# Altium PCB cw312_xc7a35t.PcbDoc (part 2 of 2)
Units mil, origin at the board's own origin, x right, y up, seen from the top; angles counter-clockwise.
Board outline 2310.04 x 2113.83 mil, 4 copper layers (Top Layer, Layer 1, Layer 2, Bottom Layer), stack 23.756 mil thick; 64 components, 69 nets, 577 pads, 221 vias.
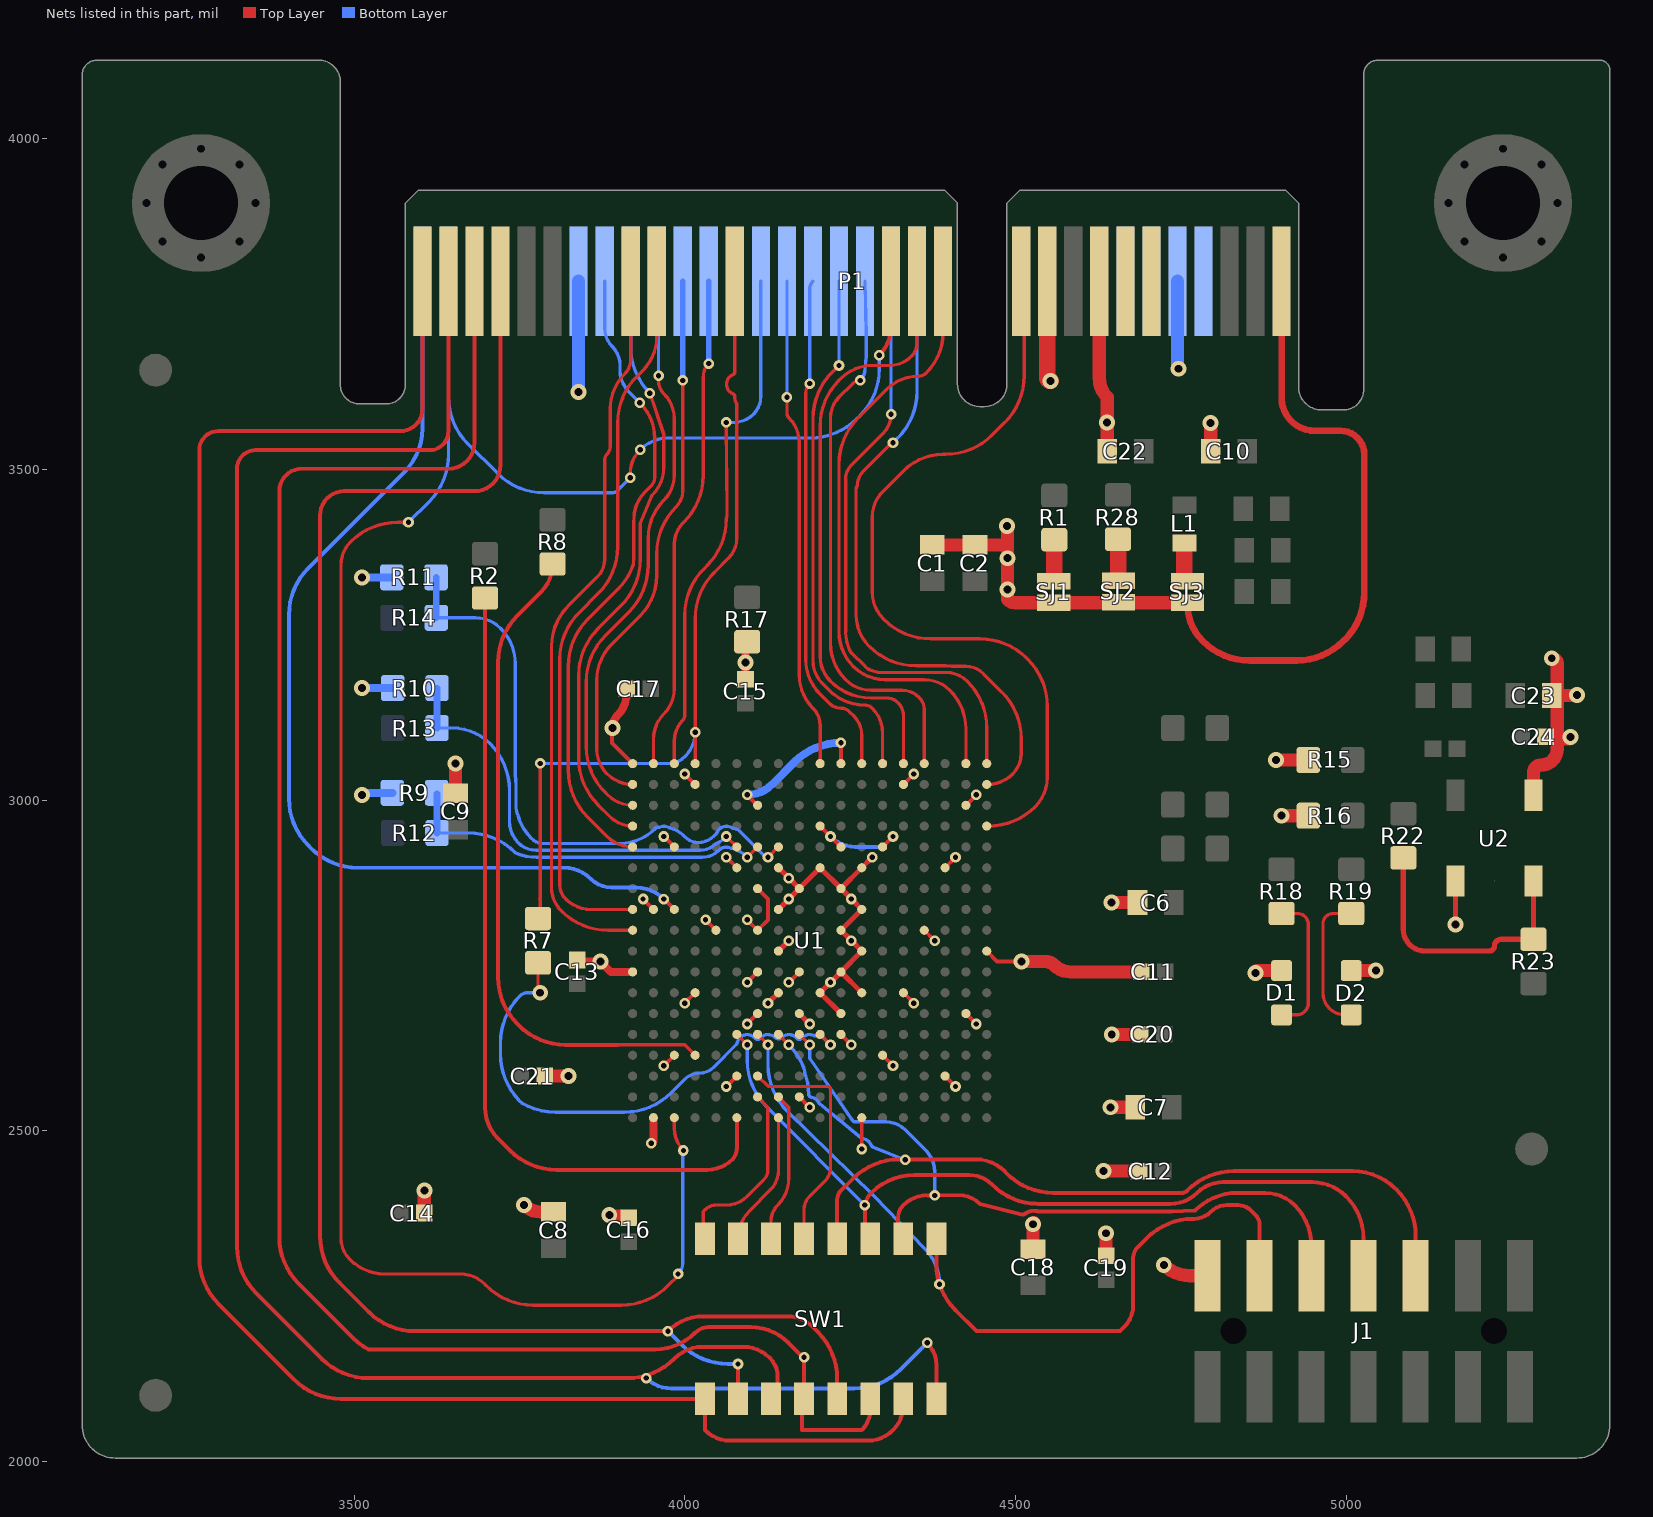
[diagram p4: the nets of this part, all layers, seen from the top]

## Via types
v1: diameter 16, hole 8, Top Layer to Bottom Layer, tented both sides, 129 vias
v2: diameter 24, hole 12, Top Layer to Bottom Layer, tented both sides, 92 vias

## Nets (pads, with @x,y where several pads share a name; then routed paths per layer and width w, separated by ;. In a path a pad name is that pad's centre, name@x,y a point inside that pad or via, vN(x,y) a via of type N, cw(c..) or ccw(c..) an arc to the next point about the centre after c; other vN are vias at no path point) (continued)
HDR5: P1.A13 U1.U1 | length 992.2
  Top Layer w5: v1(4314.96,3540.37) ccw(c4314.96,3536.53) 4312.25,3539.25 4270.19,3497.19 ccw(c4292.38,3475) 4261,3475 ccw(c4265.52,3470.48) 4259.13,3470.48 4259.13,3280.57 ccw(c4327.41,3280.57) 4279.13,3232.29 ccw(c4349.84,3303) 4349.84,3203 4395.04,3203 cw(c4395.04,3147.24) 4403.62,3202.34 ccw(c4404.35,3207.28) 4404.32,3202.28 4425,3202.28 cw(c4425,3164.47) 4451.74,3191.21 4479.57,3163.38 cw(c4408.86,3092.67) 4508.86,3092.67 4508.86,3070.41 cw(c4464.96,3070.41) 4496,3039.37 cw(c4457.98,3077.39) 4457.98,3023.62 U1.U1@4456.69,3023.62
  Bottom Layer w5: v1(4314.96,3540.37) 4322.09,3547.5 ccw(c4251.38,3618.21) 4351.38,3618.21 P1.A13@4351.38,3784.54
HDR6: P1.A14 U1.V1 | length 911.1
  Top Layer w5: v1(4312.01,3583.5) cw(c4270.75,3583.5) 4299.92,3554.33 4251.97,3506.37 ccw(c4272.97,3485.37) 4243.27,3485.37 4243.27,3254.47 ccw(c4307.47,3254.47) 4251,3223.91 ccw(c4255.38,3226.32) 4251.82,3222.82 4272.64,3202 ccw(c4294.37,3223.73) 4277.44,3198.08 ccw(c4280.15,3202.28) 4277.9,3197.82 ccw(c4303.28,3250.28) 4291.8,3193.14 ccw(c4292.76,3198.05) 4292.38,3193.06 ccw(c4294.37,3223.73) 4294.37,3193 4395.04,3193 cw(c4395.04,3147.24) 4427.4,3179.6 cw(c4356.69,3108.89) 4456.69,3108.89 U1.V1@4456.69,3055.12
  Bottom Layer w5: v1(4312.01,3583.5) P1.A14@4312.01,3784.54
HDR7: P1.A15 U1.V4 | length 851.3
  Top Layer w5: 4254.07,3629.8 4233.27,3609 ccw(c4264.16,3578.11) 4220.47,3578.11 4220.47,3237.03 ccw(c4298.3,3237.03) 4243.27,3182 ccw(c4281.9,3220.63) 4281.9,3166 4329.21,3166 cw(c4329.21,3131.37) 4353.7,3155.86 4355.09,3154.47 cw(c4337.92,3137.29) 4362.2,3137.29 U1.V4@4362.2,3055.12 ; 4254.08,3629.81 cw(c4265.52,3618.35) v1(4265.52,3634.54)
  Bottom Layer w5: v1(4265.52,3634.54) ccw(c4248.33,3651.73) 4272.64,3651.73 cw(c4277.64,3651.73) 4272.66,3652.23 4274.55,3671.23 ccw(c4259.13,3672.77) 4274.63,3672.78 4274.63,3704.37 P1.A15@4272.64,3784.54
HDR8: P1.A16 U1.V6 | length 799
  Top Layer w5: v1(4233.27,3657.16) 4223.19,3647.08 ccw(c4293.9,3576.37) 4193.9,3576.37 4193.9,3211.06 ccw(c4243.73,3211.06) 4208.49,3175.83 4218.4,3165.92 ccw(c4272.04,3219.55) 4272.04,3143.7 cw(c4272.04,3127.54) 4283.46,3138.97 cw(c4245.45,3100.95) 4299.21,3100.95 U1.V6@4299.21,3055.12
  Bottom Layer w5: v1(4233.27,3657.16) P1.A16@4233.27,3784.54
HDR9: P1.A17 U1.V7 | length 771.1
  Top Layer w5: v1(4188.98,3629.81) ccw(c4203.4,3615.38) 4183,3615.38 4183,3212.74 ccw(c4257.69,3212.74) 4204.88,3159.93 4218.49,3146.31 ccw(c4236.22,3164.04) 4236.22,3138.97 cw(c4236.22,3120.7) 4249.14,3133.62 4255.38,3127.37 cw(c4225.61,3097.6) 4267.72,3097.6 U1.V7@4267.72,3055.12
  Bottom Layer w5: v1(4188.98,3629.81) 4188.98,3772.66 cw(c4205.78,3772.66) P1.A17@4193.9,3784.54
HDR10: P1.A18 U1.V9 | length 742.8
  Top Layer w5: v1(4154.53,3609) 4154.53,3585.39 ccw(c4164.61,3585.39) 4157.48,3578.26 cw(c4120.01,3540.79) 4173,3540.79 4173,3212.74 ccw(c4257.69,3212.74) 4173.22,3206.67 cw(c4168.23,3206.35) 4173.23,3206.38 4173.23,3188.87 ccw(c4243.8,3188.87) 4193.9,3138.97 cw(c4167.76,3112.83) 4204.72,3112.83 U1.V9@4204.72,3055.12
  Bottom Layer w5: v1(4154.53,3609) P1.A18@4154.53,3784.54
IOVREF: C6.1 C7.1 C8.1 C9.1 C10.1 C11.1 C12.1 C13.1 C14.1 C15.1 C16.1 C17.1 C23.1 C24.1 D1.A D2.A J1.2 P1.A5 P1.A26 P1.B10 R9.2 R10.2 R11.2 R15.1 R16.1 R17.1 U1.A7 U1.A17 U1.B10 U1.C3 U1.C13 U1.D6 U1.D16 U1.F2 U1.G5 U1.G15 U1.H18 U1.J1 U1.K4 U1.K14 U1.L17 U1.N3 U1.N13 U1.P6 U1.P8 U1.P16 U1.R9 U1.T2 U1.T12 U1.U5 U1.U15 U1.V8 U1.V18 U2.1 U2.4 | length 2884.9
  Top Layer w6: v2(3890.76,3108.89) ccw(c3890.76,3107.89) 3889.76,3107.89 3889.76,3086.61 U1.V18@3921.26,3055.12 ; v1(3937,2850.36) U1.L17@3952.76,2834.65 ; v1(3968.5,2598.43) U1.D16@3984.25,2614.17 ; v1(3968.5,2944.88) U1.P16@3984.25,2929.13 ; v1(4000,2692.56) 4000,2692.91 U1.G15@4015.75,2708.66 ; v1(4000,3039.37) U1.U15@4015.75,3023.62 ; v1(4031.5,2818.9) U1.K14@4047.24,2803.15 ; v1(4062.99,2566.93) U1.C13@4078.74,2582.68 ; v1(4062.99,2913.39) U1.N13@4078.74,2897.64 ; v1(4094.49,3007.87) U1.T12@4110.24,2992.13 ; U1.B10@4173.23,2551.18 v1(4188.98,2535.43) ; U1.R9@4204.72,2960.63 v1(4220.47,2944.88) U1.P8@4236.22,2929.13 ; U1.V8@4236.22,3055.12 v1(4236.22,3086.61) ; v1(4267.72,2472.44) U1.A7@4267.72,2519.69 ; U1.D6@4299.21,2614.17 v1(4314.96,2598.43) ; U1.P6@4299.21,2929.13 v1(4314.96,2944.88) ; U1.G5@4330.71,2708.66 4346.46,2692.91 v1(4346.46,2692.56) ; U1.U5@4330.71,3023.62 v1(4346.46,3039.37) ; U1.K4@4362.2,2803.15 v1(4377.95,2787.4) ; U1.C3@4393.7,2582.68 v1(4409.45,2566.93) ; U1.N3@4393.7,2897.64 v1(4409.45,2913.39) ; U1.F2@4425.2,2677.17 v1(4440.94,2661.42) ; U1.T2@4425.2,2992.13 v1(4440.94,3007.87) ; U1.J1@4456.69,2771.65 4472.44,2755.91 v2(4509.13,2755.91)
  Top Layer w8: v2(5165.35,2811.93) U2.1@5165.35,2877.53
  Top Layer w12: C13.1@3837.71,2758.27 ccw(c3843.41,2763.97) 3843.41,2755.91 v2(3872.49,2755.91) 3888.24,2740.16 U1.H18@3921.26,2740.16 ; v2(3890.76,3108.89) 3890.76,3109.56 cw(c3917.7,3109.56) 3898.65,3128.61 ccw(c3865.52,3161.74) 3912.37,3161.74 C17.1@3912.37,3168.11 ; v1(3949.42,2481.2) 3952.76,2484.53 U1.A17@3952.76,2519.69 ; C15.1@4092,3182.58 v2(4092,3208.23) 4092,3237.04 cw(c4094.49,3237.04) R17.1@4094.49,3239.53
  Top Layer w20: C14.1@3606.3,2375.56 v2(3606.3,2409.45) ; C9.1@3653.54,3010.46 v2(3653.54,3055.36) ; v2(3757.08,2387.58) ccw(c3781.87,2412.37) 3781.87,2377.31 ; v2(3885.96,2372.65) 3887.05,2372.65 3888.79,2370.91 3912.91,2370.91 C16.1@3915.5,2368.31 ; v2(4509.13,2755.91) 4545.81,2755.91 cw(c4545.81,2738.67) 4558,2750.86 ccw(c4583.83,2776.68) 4583.83,2740.16 C11.1@4690.55,2740.16 ; v2(4632.98,2438.93) C12.1@4686.92,2438.93 ; v2(4643.63,2535.43) C7.1@4681.1,2535.43 ; v2(4645.3,2845.11) C6.1@4684.67,2845.11 ; v2(4724.41,2297.15) ccw(c4763.73,2336.47) 4763.73,2280.86 J1.2@4790.35,2280.86 ; C10.1@4795.28,3527.56 v2(4795.28,3570.41) ; v2(4863,2738.67) cw(c4866.46,2738.67) 4866.46,2742.13 D1.A@4902.56,2742.13 ; v2(4894.31,3060.63) R15.1@4942.91,3060.63 ; v2(4902.56,2976.38) R16.1@4942.91,2976.38 ; D2.A@5007.87,2742.13 v2(5045,2742.13) ; U2.4@5283.46,3007.45 5283.46,3041.16 cw(c5295.33,3041.16) 5295.33,3053.03 ccw(c5295.33,3077.11) 5319.41,3077.11 5319.41,3092.67 ; C23.1@5311.02,3158.05 C23.1@5319.41,3158.05 ; v2(5311.02,3214.41) cw(c5311.02,3206.02) 5319.41,3206.02 C23.1@5319.41,3158.05 ; v2(5339.26,3095.19) cw(c5336.74,3095.19) 5336.74,3092.67 5319.41,3092.67 ; v2(5349,3159) cw(c5348.05,3159) 5348.05,3158.05 C23.1@5319.41,3158.05 ; 5319.41,3092.67 C23.1@5319.41,3158.05
  Top Layer w25: P1.B10@4548.23,3784.54 4548.23,3638.7 ccw(c4553.13,3638.7) v2(4553.13,3633.8)
  Bottom Layer w6: v1(4220.47,2944.88) ccw(c4258.49,2982.9) 4258.49,2929.13 4280.18,2929.13 ccw(c4280.14,2935.13) 4281.02,2929.2 cw(c4283.46,2913.39) 4285.73,2929.22 ccw(c4286.53,2935.17) 4286.45,2929.17 4292.45,2929.13 ccw(c4292.45,2945.46) 4303.99,2933.92 v1(4314.96,2944.88)
  Bottom Layer w12: v2(3511.81,3007.87) cw(c3519.41,3000.27) 3519.41,3011.02 R9.2@3557.82,3011.02 ; v2(3511.81,3169.36) R10.2@3558.43,3169.37 ; v2(3511.81,3336.81) R11.2@3557.11,3336.81 ; v1(4094.49,3007.87) ccw(c4094.49,3060.63) 4131.79,3023.33 4165.99,3057.52 cw(c4236.22,2987.29) v1(4236.22,3086.61)
  Bottom Layer w20: v2(3839.57,3617) P1.A26@3839.57,3784.54 ; P1.A5@4745.08,3784.54 4745.08,3656.17 ccw(c4750.65,3656.17) v2(4746.71,3652.23)
JTAG_TCK: P1.B32 SW1.1 SW1.7 | length 3046.9
  Top Layer w6: P1.B32@3603.35,3784.54 3603.35,3591.27 cw(c3570.08,3591.27) 3570.08,3558 3295,3558 ccw(c3295,3529) 3266,3529 3266,2308.66 ccw(c3366,2308.66) 3295.29,2237.95 3409.46,2123.78 ccw(c3480.17,2194.49) 3480.17,2094.49 SW1.1@4030.52,2094.49 4030.52,2047.24 ccw(c4068.54,2085.26) 4068.54,2031.5 4276.94,2031.5 ccw(c4276.94,2085.26) 4314.96,2047.24 ccw(c4277.41,2084.8) 4330.52,2084.8 SW1.7@4330.52,2094.49
JTAG_TDI: P1.B29 SW1.2 SW1.5 | length 2809.3
  Top Layer w6: P1.B29@3721.46,3784.54 3721.46,3506.37 cw(c3682.09,3506.37) 3682.09,3467 3485.1,3467 ccw(c3485.1,3430.46) 3448.57,3430.46 3448.57,2340.89 ccw(c3548.57,2340.89) 3477.86,2270.18 3521.74,2226.29 ccw(c3592.45,2297) 3592.45,2197 v1(3974.57,2197) cw(c4028.39,2143.18) 4028.39,2219.29 4154.55,2219.29 cw(c4154.55,2163.65) 4193.9,2203 4201.23,2195.67 cw(c4130.52,2124.96) 4230.52,2124.96 SW1.5@4230.52,2094.49 ; SW1.2@4080.52,2094.49 v1(4080.52,2147.34)
  Bottom Layer w6: v1(3974.57,2197) 3994.95,2176.63 ccw(c4065.66,2247.34) 4065.66,2147.34 v1(4080.52,2147.34)
JTAG_TDO: P1.B30 SW1.4 SW1.6 | length 2867.4
  Top Layer w6: P1.B30@3682.09,3784.54 3682.09,3540.37 cw(c3642.72,3540.37) 3642.72,3501 3421,3501 ccw(c3421,3467) 3387,3467 3387,2339.46 ccw(c3487,2339.46) 3416.29,2268.75 3498.27,2186.77 ccw(c3568.98,2257.48) 3521.74,2169.34 3955.04,2169.34 ccw(c3955.04,2255.19) 4015.75,2194.49 cw(c4036.29,2173.95) 4036.29,2203 4099.81,2203 cw(c4099.81,2122.31) 4156.86,2179.36 4177.5,2158.73 ccw(c4180.52,2161.75) v1(4180.52,2157.48) SW1.4@4180.52,2094.49 ccw(c4187.81,2087.2) 4177.5,2087.2 4177.5,2047.24 4267.72,2047.24 ccw(c4236.82,2078.15) 4280.52,2078.15 SW1.6@4280.52,2094.49
JTAG_TMS: P1.B31 SW1.3 SW1.8 | length 3285.5
  Top Layer w6: P1.B31@3642.72,3784.54 3642.72,3557.86 cw(c3613.86,3557.86) 3613.86,3529 3351,3529 ccw(c3351,3501) 3323,3501 3323,2324.72 ccw(c3423,2324.72) 3352.29,2254.01 3451.03,2155.27 ccw(c3521.74,2225.98) 3521.74,2125.98 3913.54,2125.98 ccw(c3913.54,2225.98) 3984.25,2155.27 cw(c4027.6,2111.93) 4027.6,2173.23 4088.59,2173.23 cw(c4088.59,2117.65) 4127.89,2156.95 4129.56,2155.27 cw(c4102.94,2128.65) 4140.59,2128.65 4140.59,2118.81 cw(c4106.2,2118.81) SW1.3@4130.52,2094.49 ; v1(4366.68,2179.36) cw(c4333.26,2145.95) 4380.52,2145.95 SW1.8@4380.52,2094.49
  Bottom Layer w6: v1(3942.06,2125.98) ccw(c3980.08,2164) 3980.08,2110.24 4256.13,2110.24 ccw(c4256.13,2210.24) 4326.84,2139.53 v1(4366.68,2179.36)
JTAG_TRST: P1.A32 U1.L16 | length 1518.5
  Top Layer w6: v1@3968.5,2850.39 U1.L16@3984.25,2834.65
  Bottom Layer w6: P1.A32@3603.35,3784.54 3603.35,3561.95 cw(c3510.17,3561.95) 3576.06,3496.06 3430.86,3350.87 ccw(c3501.57,3280.16) 3401.57,3280.16 3401.57,3002.05 ccw(c3501.57,3002.05) 3430.86,2931.34 3435.28,2926.93 ccw(c3505.99,2997.64) 3505.99,2897.64 3817.39,2897.64 cw(c3817.39,2840.1) 3858.08,2880.79 ccw(c3889.83,2912.54) 3889.83,2867.63 3926.58,2867.63 cw(c3926.58,2808.35) v1(3968.5,2850.27)
LED1: P1.B11 U1.R1 | length 1195.7
  Top Layer w5: U1.R1@4456.69,2960.63 4459.21,2960.63 ccw(c4459.21,3060.63) 4529.92,2989.92 ccw(c4485.72,3034.12) 4548.23,3034.12 4548.23,3142.03 ccw(c4448.23,3142.03) 4518.94,3212.74 4517.27,3214.41 ccw(c4446.56,3143.7) 4446.56,3243.7 4372.01,3243.7 cw(c4372.01,3343.7) 4301.3,3272.99 4300.83,3273.46 cw(c4342.75,3315.38) 4283.46,3315.38 4283.46,3427.26 cw(c4339.66,3427.26) 4299.92,3467 4331.07,3498.14 cw(c4390.62,3438.59) 4390.62,3522.81 4394.42,3522.81 ccw(c4394.42,3622.81) 4465.13,3552.1 4484.02,3570.99 ccw(c4413.31,3641.7) 4513.31,3641.7 4513.31,3773.79 ccw(c4498.1,3773.79) P1.B11@4508.86,3784.54
LED2: P1.B12 U1.V2 | length 935.4
  Top Layer w5: P1.B12@4390.75,3784.54 4390.75,3707.59 cw(c4303.27,3707.59) 4365.13,3645.73 cw(c4353.7,3657.16) 4353.7,3641 ccw(c4353.7,3572.43) 4305.21,3620.92 4262.56,3578.26 ccw(c4333.27,3507.55) 4233.27,3507.55 4233.27,3254.47 ccw(c4307.47,3254.47) 4255,3202 ccw(c4303.28,3250.28) 4303.28,3182 4362.37,3182 cw(c4362.37,3127.37) 4401,3166 cw(c4342.58,3107.58) 4425.2,3107.58 U1.V2@4425.2,3055.12
LED3: P1.B13 U1.V5 | length 907.5
  Top Layer w5: U1.V5@4330.71,3055.12 4330.71,3127.51 ccw(c4302.81,3127.51) 4322.54,3147.24 4322.45,3147.33 ccw(c4305.21,3130.09) 4305.21,3154.47 4281.15,3154.47 cw(c4281.15,3240.27) 4220.47,3179.6 cw(c4258.49,3217.62) 4204.72,3217.62 4204.72,3565.63 cw(c4302.18,3565.63) 4233.27,3634.54 4236.38,3637.66 cw(c4283.46,3590.57) 4283.46,3657.16 4309.59,3657.16 ccw(c4309.59,3704.41) 4343,3671 ccw(c4322.77,3691.23) 4351.38,3691.23 P1.B13@4351.38,3784.54
M0: R9.1 R12.2 U1.P12 | length 570
  Top Layer w5: v1(4094.49,2913.39) U1.P12@4110.24,2929.13
  Bottom Layer w5: R9.1@3624.75,3011.02 cw(c3623.29,3009.56) R9.1@3625.35,3009.56 ; R12.2@3625.35,2950.27 3672.52,2950.27 cw(c3672.52,2850.27) 3743.23,2920.98 3743.88,2920.34 ccw(c3775.82,2990.27) 3775.82,2913.39 4026.81,2913.39 ccw(c4026.81,2946.22) 4050.03,2923 ccw(c4048.32,2927.7) 4051.88,2924.19 cw(c4062.99,2913.39) 4069.72,2927.35 ccw(c4071.85,2931.87) 4070.78,2926.99 cw(c4061.63,2883.77) 4092.86,2915.01 v1(4094.49,2913.39)
  Bottom Layer w10: R12.2@3625.35,2950.27 R9.1@3625.35,3009.56
M1: R10.1 R13.2 U1.P13 | length 654.6
  Top Layer w5: v1(4062.99,2944.88) U1.P13@4078.74,2929.13
  Bottom Layer w5: R13.2@3625.35,3108.89 3648.84,3108.89 cw(c3648.84,3028.5) 3705.68,3085.34 cw(c3634.97,3014.63) 3734.97,3014.63 3734.97,2968.01 ccw(c3781.47,2968.01) 3748.59,2935.13 ccw(c3775,2961.55) 3775,2924.19 4023.72,2924.19 ccw(c4023.72,2956.52) 4046.58,2933.66 ccw(c4045.84,2938.61) 4048.62,2934.45 cw(c4062.99,2913.39) 4052.73,2936.73 ccw(c4050.69,2941.29) 4053.38,2937.08 ccw(c4020.66,2987.21) v1(4062.99,2944.88)
  Bottom Layer w10: R13.2@3625.35,3108.89 R10.1@3625.35,3169.37
M2: R11.1 R14.2 U1.P11 | length 915.5
  Top Layer w5: v1(4125.98,2913.39) 4125.98,2913.7 4141.42,2929.13 U1.P11@4141.73,2929.13
  Bottom Layer w5: R14.2@3624.36,3275.59 3683.44,3275.59 cw(c3683.44,3221.82) 3721.46,3259.84 cw(c3667.33,3205.72) 3743.88,3205.72 3743.88,3038.33 ccw(c3748.88,3038.37) 3743.92,3037.71 cw(c3634.97,3022.55) 3744.97,3022.55 3744.97,2988.61 ccw(c3749.97,2988.64) 3745.03,2987.88 ccw(c3829.55,3001.87) 3768.97,2941.29 ccw(c3785.48,2957.81) 3785.48,2934.45 3902.02,2934.45 ccw(c3902.02,3008.65) 3954.48,2956.18 cw(c3961.39,2949.27) 3961.39,2959.05 ccw(c3961.22,2964.04) 3962.97,2959.36 cw(c3968.5,2944.88) 3976.4,2958.22 ccw(c3978.91,2962.54) 3977.77,2957.67 cw(c3968.5,2916.88) 3998.08,2946.46 4000.14,2944.41 ccw(c4020.66,2964.93) 4020.66,2935.9 ccw(c4020.66,2969.66) 4044.54,2945.79 4046.8,2948.05 ccw(c4043.78,2952.04) 4048.46,2950.27 cw(c4062.99,2944.88) 4071.28,2957.98 ccw(c4073.66,2962.38) 4073.19,2957.4 cw(c4071.85,2941.61) 4083.06,2952.81 4120.01,2915.86 ccw(c4125.98,2921.83) v1(4125.98,2913.39)
  Bottom Layer w10: R11.1@3624.04,3336.81 3624.04,3275.91 R14.2@3624.36,3275.59
MISO: P1.B23 U1.L18 | length 1086.9
  Top Layer w5: U1.L18@3921.26,2834.65 3857.9,2834.65 cw(c3857.9,2888.41) 3819.88,2850.39 cw(c3841.27,2871.78) 3811.02,2871.78 3811.02,3212.72 cw(c3911.02,3212.72) 3840.31,3283.43 3869.36,3312.48 ccw(c3798.65,3383.19) 3898.65,3383.19 3898.65,3570.41 cw(c3998.65,3570.41) 3927.94,3641.12 3937.01,3650.19 ccw(c3887.11,3700.08) 3957.68,3700.08 P1.B23@3957.68,3784.54
MOSI: P1.B24 U1.K18 | length 1110.3
  Top Layer w5: P1.B24@3918.31,3784.54 3918.31,3666.61 cw(c3885.65,3666.61) 3908.74,3643.52 ccw(c3960.5,3591.76) 3887.3,3591.76 3887.3,3534.64 cw(c3870.56,3534.64) 3882.4,3522.81 ccw(c3890.76,3514.45) 3878.94,3514.45 3878.94,3364.25 cw(c3840.85,3364.25) 3867.78,3337.32 3824,3293.54 ccw(c3885.2,3232.34) 3798.65,3232.34 3798.65,2867.63 ccw(c3848.43,2867.63) 3813.23,2832.44 ccw(c3883.94,2903.15) 3883.94,2803.15 U1.K18@3921.26,2803.15
NetD1_K: D1.K R18.2 | length 219.3
  Top Layer w5: D1.K@4902.56,2675.2 4925.2,2675.2 ccw(c4925.2,2692.91) 4942.91,2692.91 4942.91,2811.93 ccw(c4926.34,2811.93) 4926.34,2828.5 R18.2@4902.56,2828.5
NetD2_K: D2.K R19.2 | length 218
  Top Layer w5: D2.K@5007.87,2675.2 4998.49,2675.2 cw(c4998.49,2708.66) 4965.03,2708.66 4965.03,2812.97 cw(c4980.55,2812.97) 4980.55,2828.5 R19.2@5007.87,2828.5
NetJ1_4: J1.4 SW1.9 U1.E12 | length 1292.5
  Top Layer w5: U1.E12@4110.24,2645.67 v1(4125.98,2629.92)
  Top Layer w6: SW1.9@4380.52,2336.61 4380.52,2298.85 ccw(c4480.52,2298.85) 4409.81,2228.14 4440.94,2197 4658.39,2197 4664.39,2203 ccw(c4631.16,2236.22) 4678.15,2236.22 4678.15,2307.79 cw(c4700.41,2307.79) 4684.67,2323.53 4698.74,2337.6 cw(c4769.45,2266.89) 4769.45,2366.89 4770.11,2366.89 ccw(c4770.11,2402.48) 4795.28,2377.31 cw(c4820.06,2352.52) 4820.06,2387.58 4836.34,2387.58 cw(c4836.34,2359.26) 4856.36,2379.28 4863,2372.65 cw(c4848.29,2357.93) 4869.09,2357.93 J1.4@4869.09,2280.86
  Bottom Layer w5: v1(4125.98,2629.92) 4125.98,2599.95 ccw(c4225.98,2599.95) 4155.26,2529.25 4155.3,2529.21 4286.07,2401.53 cw(c4272.44,2387.58) 4286.5,2401.09 4363,2321.51 ccw(c4366.6,2324.98) 4363.05,2321.46 ; 4363.08,2321.43 cw(c4309.33,2267.72) v1(4385.32,2267.72)
NetJ1_6: J1.6 SW1.10 U1.E10 | length 1139.2
  Top Layer w5: U1.E10@4173.23,2645.67 v1(4188.98,2629.92)
  Top Layer w6: SW1.10@4330.52,2336.61 cw(c4349.78,2355.88) 4322.54,2355.88 4322.54,2368.31 cw(c4349.33,2368.31) 4330.39,2387.25 cw(c4367.13,2350.51) 4367.13,2402.48 4367.39,2402.21 v1(4377.95,2402.21) ; v1@4377.95,2402.48 4414.51,2402.48 cw(c4414.51,2357.15) 4446.56,2389.2 4509.75,2373.55 ccw(c4511.15,2379.39) 4514.73,2374.57 cw(c4526.76,2358.6) 4521.3,2377.84 ccw(c4519.61,2383.6) 4521.61,2377.94 cw(c4527.77,2361.03) 4532.48,2378.4 ccw(c4534.01,2384.2) 4533.97,2378.2 4734.17,2378.2 ccw(c4734.17,2446.64) 4736.2,2378.23 4771.65,2379.28 cw(c4836.21,2314.73) 4783.4,2389.2 cw(c4836.21,2314.73) 4836.21,2406.02 4877.71,2406.02 cw(c4877.71,2343.05) 4922.25,2387.58 cw(c4860.47,2325.8) 4947.83,2325.8 J1.6@4947.83,2280.86
  Bottom Layer w5: v1(4188.98,2629.92) 4188.98,2611.1 ccw(c4193.98,2611.1) 4189.85,2608.28 4253.67,2515.65 ccw(c4257.78,2518.5) 4257.78,2513.5 4303.99,2513.5 cw(c4303.99,2472.12) 4333.26,2501.38 4364.95,2469.69 cw(c4333.57,2438.3) 4377.95,2438.3 v1(4377.95,2402.21)
NetJ1_8: J1.8 SW1.11 U1.E13 | length 1286.9
  Top Layer w5: U1.E13@4078.74,2645.67 v1(4094.49,2629.92)
  Top Layer w6: SW1.11@4280.52,2336.61 cw(c4299.54,2355.63) 4272.64,2355.63 4272.64,2383.67 cw(c4304.24,2383.67) 4281.9,2406.02 cw(c4347.3,2340.62) 4347.3,2433.12 4429.41,2433.12 cw(c4429.41,2382.84) 4464.96,2418.39 ccw(c4535.42,2488.86) 4523.69,2389.89 ccw(c4524.35,2395.86) 4524.89,2389.88 cw(c4527.77,2361.03) 4534.07,2389.33 ccw(c4535.32,2395.2) 4535.25,2389.2 ccw(c4535.42,2488.86) 4535.42,2389.2 4734.17,2389.2 ccw(c4734.17,2446.64) 4774.78,2406.02 cw(c4814.23,2366.57) 4814.23,2422.37 4948.21,2422.37 cw(c4948.21,2349.13) 5000,2400.92 cw(c4935.84,2336.76) 5026.57,2336.76 J1.8@5026.57,2280.86
  Bottom Layer w5: v1(4094.49,2629.92) 4094.49,2606.95 ccw(c4194.49,2606.95) 4123.78,2536.24 v1(4272.44,2387.58)
NetJ1_10: J1.10 SW1.12 U1.E11 | length 1375
  Top Layer w5: U1.E11@4141.73,2645.67 v1(4157.48,2629.92)
  Top Layer w6: SW1.12@4230.52,2336.61 4230.52,2395.68 cw(c4249.99,2395.68) 4236.22,2409.45 4254.18,2427.4 cw(c4324.89,2356.69) 4324.89,2456.69 ; v1@4333.26,2456.69 4440.46,2456.69 cw(c4440.46,2396.06) 4483.34,2438.93 4486.96,2435.31 ccw(c4557.67,2506.02) 4557.67,2406.02 4751.22,2406.02 ccw(c4751.22,2418.39) 4759.96,2409.65 cw(c4830.67,2338.93) 4830.67,2438.93 5009.41,2438.93 cw(c5009.41,2344.72) 5076.03,2411.34 cw(c5005.31,2340.63) 5105.31,2340.63 J1.10@5105.31,2280.86
  Bottom Layer w5: v1(4157.48,2629.92) cw(c4086.84,2559.15) 4179.95,2595.6 cw(c4175.28,2593.82) 4180.22,2594.6 ccw(c4288.98,2611.1) 4185.7,2573.23 cw(c4180.99,2571.54) 4185.98,2571.92 4187.35,2555.21 ccw(c4192.33,2555.66) 4191.48,2550.73 cw(c4188.98,2535.43) 4202.9,2542.25 ccw(c4207.37,2544.49) 4204.16,2540.65 4267.06,2488.9 ccw(c4270.19,2492.79) 4269.54,2487.83 cw(c4267.72,2472.44) 4282.23,2477.89 ccw(c4286.89,2479.69) 4285.01,2475.05 v1(4333.26,2455.93)
NetL1_1: L1.1 SJ3.2 | length 59.1
  Top Layer w25: L1.1@4755.53,3388.78 4755.53,3341.61 ccw(c4770.7,3341.61) SJ3.2@4759.97,3330.87
NetR1_1: R1.1 SJ1.2 | length 63.1
  Top Layer w25: SJ1.2@4558,3330.87 ccw(c4556.09,3332.79) 4558.79,3332.79 R1.1@4558.79,3393.73
NetR2_2: R2.2 U1.A13 | length 1261.2
  Top Layer w6: R2.2@3698,3305.54 3698,2535.71 ccw(c3765.21,2535.71) 3717.69,2488.19 3735.64,2470.23 ccw(c3806.35,2540.94) 3806.35,2440.94 4033.98,2440.94 ccw(c4033.98,2494.71) 4072,2456.69 ccw(c4055.73,2472.96) 4078.74,2472.96 U1.A13@4078.74,2519.69
NetR7_2: R7.2 U1.E9 | length 809.8
  Top Layer w5: R7.2@3778.21,2753.94 3778.21,2714.22 ccw(c3786.07,2714.22) 3780.51,2708.66 v2(3781.47,2708.66) ; U1.E9@4204.72,2645.67 v1(4220.47,2629.92)
  Bottom Layer w5: v2(3781.47,2708.66) 3762.55,2708.66 ccw(c3762.55,2691.97) 3750.75,2703.77 ccw(c3821.46,2633.06) 3721.46,2633.06 3721.46,2615.46 ccw(c3821.46,2615.46) 3750.75,2544.75 3753.23,2542.27 ccw(c3804.59,2628.07) 3804.59,2528.07 3908.7,2528.07 ccw(c3908.7,2628.07) 3979.41,2557.36 3999.37,2577.32 cw(c4023.72,2552.96) 4023.72,2587.4 ccw(c4023.72,2614.49) 4042.87,2595.33 4077.94,2630.41 ccw(c4074.38,2633.92) 4079.28,2632.92 cw(c4094.49,2629.92) 4106.36,2639.89 ccw(c4110.15,2643.14) 4109.3,2638.22 4109.52,2638.18 ccw(c4110.3,2643.12) 4114.11,2639.88 cw(c4125.98,2629.92) 4136.82,2641.01 ccw(c4140.28,2644.62) 4138.65,2639.89 4140.93,2639.13 ccw(c4142.47,2643.89) 4146.11,2640.46 cw(c4157.48,2629.92) 4169.41,2639.82 ccw(c4173.23,2643.05) 4177.05,2639.82 cw(c4188.98,2629.92) 4195.89,2643.8 ccw(c4198.07,2648.29) 4199.72,2643.58 cw(c4199.72,2626.45) 4211.83,2638.56 v1(4220.47,2629.92)
NetR8_2: R8.2 U1.D15 | length 1014.7
  Top Layer w5: 3898.65,2629.92 4000,2629.92 U1.D15@4015.75,2614.17
  Top Layer w6: R8.2@3800.2,3356.93 cw(c3740.41,3356.93) 3782.69,3314.66 3746.97,3278.94 ccw(c3817.69,3208.23) 3717.69,3208.23 3717.69,2732.15 ccw(c3817.69,2732.15) 3746.97,2661.44 3749.21,2659.21 ccw(c3819.92,2729.92) 3819.92,2629.92 3898.65,2629.92
NetR22_2: R22.2 R23.1 U2.3 | length 421.9
  Top Layer w8: R22.2@5086.61,2912.54 5086.61,2804.45 ccw(c5119.41,2804.45) 5119.41,2771.65 5216.54,2771.65 ccw(c5216.54,2779.53) 5224.41,2779.53 cw(c5234.25,2779.53) 5234.25,2789.37 R23.1@5283.46,2789.37 U2.3@5283.46,2877.53
NetR28_1: R28.1 SJ2.2 | length 62.7
  Top Layer w25: R28.1@4655.07,3394.49 cw(c4653.69,3393.11) 4655.64,3393.11 SJ2.2@4655.64,3331.89
NetSW1_13: SW1.13 U1.C12 | length 359.5
  Top Layer w5: U1.C12@4110.24,2582.68 4125.98,2566.93 4217.54,2566.93 4220.47,2564 4220.47,2443.5 cw(c4193.71,2443.5) 4212.63,2424.57 4188.98,2400.92 ccw(c4209.4,2380.49) 4180.52,2380.49 SW1.13@4180.52,2336.61
NetSW1_14: SW1.14 U1.B11 | length 228.3
  Top Layer w5: SW1.14@4130.52,2336.61 4130.52,2363.26 cw(c4164.91,2363.26) 4140.59,2387.58 ccw(c4099.81,2428.36) 4157.48,2428.36 4157.48,2535.43 U1.B11@4141.73,2551.18
NetSW1_15: SW1.15 U1.A11 | length 204.1
  Top Layer w5: SW1.15@4080.52,2336.61 cw(c4140.59,2336.61) 4098.11,2379.09 4129.56,2410.54 ccw(c4100.18,2439.93) 4141.73,2439.93 U1.A11@4141.73,2519.69
NetSW1_16: SW1.16 U1.B12 | length 284.5
  Top Layer w5: SW1.16@4030.52,2336.61 cw(c4030.52,2339.19) 4027.94,2339.19 4027.94,2377.6 4031.32,2380.98 cw(c4047.24,2365.06) 4047.24,2387.58 4062.29,2387.58 ccw(c4062.29,2433.12) 4094.49,2400.92 4119.7,2426.13 ccw(c4105.13,2440.7) 4125.74,2440.7 4125.74,2535.68 U1.B12@4110.24,2551.18
nRST: P1.A31 P1.B14 U1.A16 | length 3327.7
  Top Layer w5: v1(3582.29,3419.91) 3565.6,3419.91 ccw(c3565.6,3319.91) 3494.89,3390.62 ccw(c3530.08,3355.42) 3480.32,3355.42 3480.32,2337.23 ccw(c3525.26,2337.23) 3493.48,2305.45 ccw(c3546.55,2358.52) 3546.55,2283.46 3659.98,2283.46 cw(c3659.98,2229.7) 3698,2267.72 3700.21,2265.51 ccw(c3770.92,2336.22) 3770.92,2236.22 3903.86,2236.22 ccw(c3903.86,2336.22) 3974.57,2265.51 3989.92,2280.86 v1(3989.92,2283.46) ; v1(3917.46,3487.58) 3917.46,3493.09 cw(c3969.44,3493.09) v1(3932.69,3529.84) ; U1.A16@3984.25,2519.69 3984.25,2503.57 ccw(c4031.47,2503.57) v1(3998.08,2470.18)
  Top Layer w6: v1(4294.37,3672.77) ccw(c4251.77,3715.36) 4312.01,3715.36 P1.B14@4312.01,3784.54
  Bottom Layer w5: v1@3576.06,3417.32 ccw(c3576.06,3426.14) v1(3582.29,3419.91) 3613.43,3451.04 ccw(c3542.72,3521.75) 3642.72,3521.75 3642.72,3609.49 ; P1.A31@3642.72,3784.54 3642.72,3609.49 ; v1(3917.46,3487.58) 3897.05,3467.17 cw(c3890.76,3473.46) 3890.76,3464.57 3787.64,3464.57 cw(c3787.64,3564.57) 3716.93,3493.86 3672.01,3538.78 cw(c3742.72,3609.49) 3642.72,3609.49 ; v1(3932.69,3529.84) cw(c3975.31,3487.22) 3975.31,3547.5 4189.67,3547.5 ccw(c4189.67,3647.5) 4260.38,3576.79 4265.08,3581.49 ccw(c4194.37,3652.2) 4294.37,3652.2 v1(4294.37,3672.77) ; v1@3987.73,2279.29 ccw(c3984.28,2282.92) 3988.9,2281 v1(3989.92,2283.46) ; v1@3990.25,2283.6 ccw(c3974.19,2299.66) 3996.9,2299.66 3996.9,2469.69 v1(3998.08,2470.18)
nRST_OUT: P1.A19 U1.V16 | length 786
  Top Layer w5: U1.V16@3984.25,3055.12 3984.25,3089.8 cw(c4027.94,3089.8) 3997.05,3120.7 ccw(c3989.92,3127.82) 4000,3127.82 4000,3279.28 cw(c4100,3279.28) 4029.29,3349.99 4033.7,3354.4 ccw(c3962.99,3425.11) 4062.99,3425.11 cw(c4067.99,3425.11) 4063.12,3426.24 4063.53,3428.03 ccw(c4044.54,3432.42) 4064.04,3432.57 v1(4062.99,3570.99)
  Bottom Layer w5: v1(4062.99,3570.99) 4073.8,3570.99 ccw(c4073.8,3613.7) 4104,3583.5 ccw(c4077.06,3610.44) 4115.16,3610.44 P1.A19@4115.16,3784.54
SCK: P1.B20 R7.1 U1.V15 | length 1260.7
  Top Layer w5: R7.1@3778.21,2820.87 ccw(c3770.35,2828.73) 3781.47,2828.73 3781.47,2852.7 ; 3780.51,2850.39 ccw(c3778.21,2852.7) 3781.47,2852.7 ; v1(3781.47,3055.36) 3781.47,2852.7 ; U1.V15@4015.75,3055.12 v1(4015.75,3102.36) 4015.75,3273.96 cw(c4115.75,3273.96) 4045.04,3344.67 4066.11,3365.74 ccw(c4035.61,3396.23) 4078.74,3396.23 4078.74,3600 cw(c4085.87,3607.13) 4075.79,3607.13 4075.79,3609.89 ccw(c4070.79,3609.86) 4072.71,3614.48 cw(c4078.74,3628.76) 4072.72,3643.04 ccw(c4070.75,3647.64) 4075.75,3647.58 P1.B20@4075.79,3784.54
  Bottom Layer w5: v1(3781.47,3055.36) 3974.76,3055.36 ccw(c3974.76,3092.09) 4000.73,3066.12 ccw(c3964.49,3102.36) v1(4015.75,3102.36)
SHUNTL: C1.1 C2.1 P1.B1 SJ1.1 SJ2.1 SJ3.1 U1.F8 U1.F10 U1.G7 U1.G9 U1.G11 U1.H8 U1.J7 U1.J11 U1.K8 U1.L7 U1.L11 U1.M8 U1.M10 U1.N7 U1.N9 U1.N11 | length 2055.6
  Top Layer w8: v1(4125.98,2692.91) U1.G11@4141.73,2708.66 ; U1.J11@4141.73,2771.65 v1(4157.48,2787.4) ; U1.L11@4141.73,2834.65 v1(4157.48,2850.39) U1.M10@4173.23,2866.14 ; U1.N11@4141.73,2897.64 v1(4157.48,2881.89) U1.M10@4173.23,2866.14 ; U1.F10@4173.23,2677.17 v1(4188.98,2661.42) ; U1.F8@4236.22,2677.17 U1.G9@4204.72,2708.66 v1(4220.47,2724.41) U1.H8@4236.22,2740.16 ; U1.G7@4267.72,2708.66 U1.H8@4236.22,2740.16 ; v1(4283.46,2913.39) U1.N7@4267.72,2897.64 U1.M8@4236.22,2866.14 ; U1.M10@4173.23,2866.14 U1.N9@4204.72,2897.64 U1.M8@4236.22,2866.14 ; U1.H8@4236.22,2740.16 U1.J7@4267.72,2771.65 v1(4251.97,2787.4) U1.K8@4236.22,2803.15 U1.L7@4267.72,2834.65 v1(4251.97,2850.39) U1.M8@4236.22,2866.14
  Top Layer w10: SJ3.1@4759.97,3298.44 4759.97,3296.85 ccw(c4839.92,3296.85) 4783.39,3240.32 ccw(c4854.1,3311.03) 4854.1,3211.03 4925.18,3211.03 ccw(c4925.18,3311.03) 4995.89,3240.32 4998.27,3242.7 ccw(c4927.56,3313.41) 5027.56,3313.41 5027.56,3522.81 ccw(c4992.08,3522.81) 4992.08,3558.29 4952.76,3558.29 cw(c4952.76,3608.49) 4902.56,3608.49 P1.B1@4902.56,3784.54
  Top Layer w20: C1.1@4374.4,3385.83 C2.1@4438.77,3385.83 ; C2.1@4438.77,3385.83 4487.68,3385.8 4488.04,3386.15 ; v2(4487.6,3414.26) 4488.04,3413.83 4488.04,3386.15 ; SJ3.1@4759.97,3298.44 SJ1.1@4558,3298.44 4499.67,3298.44 cw(c4499.67,3314.89) 4488.04,3303.26 v2(4488.04,3318.63) v2(4488.04,3365.74) 4488.04,3386.15
TRACECLK: P1.A21 U1.V17 | length 752
  Top Layer w5: U1.V17@3952.76,3055.12 3952.76,3092.07 cw(c4006.52,3092.07) 3968.5,3130.09 ccw(c3930.48,3168.11) 3984.25,3168.11 3984.25,3387.6 cw(c4027.94,3387.6) 3997.04,3418.49 3998.65,3420.1 ccw(c3927.94,3490.81) 4027.94,3490.81 4027.94,3639.53 cw(c4056.88,3639.53) v1(4036.42,3660)
  Bottom Layer w8: v1(4036.42,3660) P1.A21@4036.42,3784.54
TRACED0: P1.A22 U1.U18 | length 833.2
  Top Layer w5: U1.U18@3921.26,3023.62 cw(c3921.26,3078.58) 3882.4,3039.72 cw(c3919.58,3076.9) 3867,3076.9 3867,3180.85 cw(c3944.72,3180.85) 3889.76,3235.8 3932.73,3278.76 ccw(c3872.49,3339) 3957.68,3339 3957.68,3372.55 cw(c4057.68,3372.55) 3986.97,3443.26 ccw(c3962.62,3467.6) 3997.05,3467.6 v1(3997.05,3634.54)
  Bottom Layer w8: v1(3997.05,3634.54) P1.A22@3997.05,3784.54
TRACED1: P1.A23 U1.T18 | length 875.8
  Top Layer w5: U1.T18@3921.26,2992.13 cw(c3921.26,3045.88) 3883.25,3007.87 3880.29,3010.83 cw(c3951,3081.54) 3851,3081.54 3851,3178.4 cw(c3951,3178.4) 3880.29,3249.11 3915.43,3284.25 ccw(c3844.72,3354.96) 3944.72,3354.96 3944.72,3395.92 cw(c4025.92,3395.92) 3968.5,3453.34 ccw(c3930.48,3491.36) 3984.25,3491.36 3984.25,3576.46 ccw(c3930.48,3576.46) 3968.5,3614.48 cw(c3987.82,3633.8) 3960.5,3633.8 v1(3960.5,3641.7)
  Bottom Layer w5: P1.A23@3957.68,3784.54 cw(c3950.86,3777.72) 3960.5,3777.72 v1(3960.5,3641.7)
TRACED2: P1.A24 U1.R18 | length 912.7
  Top Layer w5: U1.R18@3921.26,2960.63 cw(c3921.26,3009.05) 3887.02,2974.81 3868.86,2992.98 cw(c3939.57,3063.69) 3839.57,3063.69 3839.57,3188.25 cw(c3939.57,3188.25) 3868.86,3258.96 3903.44,3293.54 ccw(c3832.73,3364.25) 3932.73,3364.25 3932.73,3417.11 cw(c3937.73,3417.11) 3933.1,3419.02 3949.94,3459.63 cw(c3954.56,3457.72) 3950.99,3461.23 ccw(c3908.74,3503.49) 3968.5,3503.49 3968.5,3551.58 ccw(c3963.5,3551.58) 3968.24,3553.18 v1(3947.33,3615.3)
  Bottom Layer w5: P1.A24@3918.31,3784.54 3918.31,3685.37 ccw(c4017.4,3685.37) v1(3947.33,3615.3)
TRACED3: P1.A25 U1.P18 | length 968.8
  Top Layer w5: U1.P18@3921.26,2929.13 cw(c3921.26,2984.7) 3881.97,2945.41 3853.29,2974.09 cw(c3924,3044.8) 3824,3044.8 3824,3202.56 cw(c3924,3202.56) 3853.29,3273.27 3898.65,3318.63 ccw(c3827.94,3389.35) 3922.18,3355.9 ccw(c3917.46,3357.54) 3922.44,3357.14 ccw(c3832.73,3364.25) 3922.73,3364.25 3922.73,3417.11 cw(c3995.12,3417.11) 3923.29,3426.13 cw(c3978.63,3426.13) 3939.5,3465.26 3949.42,3475.18 ccw(c3937.02,3487.58) 3950.1,3475.9 ; v1(3932.11,3600.62) 3932.73,3600 cw(c3880.02,3547.3) 3954.56,3547.3 3954.56,3487.58 cw(c3937.02,3487.58) 3953.81,3482.52 cw(c3949.03,3483.98) 3953.54,3481.84 cw(c3908.74,3503.49) 3950.51,3476.45 cw(c3946.33,3479.19) 3950.13,3475.93
  Bottom Layer w5: P1.A25@3878.94,3784.54 3878.94,3713.92 ccw(c3919.31,3713.92) 3890.76,3685.37 cw(c3863.58,3658.19) 3902.02,3658.19 3902.02,3650.5 ccw(c3949.82,3650.5) 3916.02,3616.71 v1(3932.11,3600.62)
VCC1.0: P1.B6
VCC1.2: P1.B7
VCC1.8: C18.1 C19.1 C20.1 C21.1 C22.1 P1.B8 U1.E8 U1.F12 U1.H10 U1.H12 U1.K12 U1.M12 | length 600.5
  Top Layer w6: v1(4094.49,2661.42) U1.F12@4110.24,2677.17 ; v1(4094.49,2724.41) U1.H12@4110.24,2740.16 ; v1(4094.49,2818.9) U1.K12@4110.24,2803.15 4125.98,2818.9 4125.98,2850.39 U1.M12@4110.24,2866.14 ; v1(4157.48,2724.41) U1.H10@4173.23,2740.16 ; U1.E8@4236.22,2645.67 v1(4251.97,2629.92)
  Top Layer w20: C21.1@3788.43,2582.68 v2(3824,2582.68) ; C18.1@4526.76,2321.14 v2(4526.76,2358.6) cw(c4530.19,2358.6) v2@4527.77,2361.03 ; P1.B8@4626.97,3784.54 4626.97,3637.51 ccw(c4667.29,3637.51) 4638.78,3609 v2(4638.78,3570.97) C22.1@4638.78,3527.56 ; C19.1@4637.18,2310.97 v2(4637.15,2345.02) ; v2(4645.67,2645.67) C20.1@4688.89,2645.67
VCC2.5: P1.A4
VCC5.0: P1.A6
VCCADJ: P1.A7
pads on no net: D1.0 D2.0 FID1.M1 FID2.M1 FID3.M1 J1.12 J1.14 J1.MH1 J1.MH2 P1.A30 P1.B28 R1.0 R2.0 R7.0 R8.0 R9.0 R10.0 R11.0 R12.0 R13.0 R14.0 R15.0 R16.0 R17.0 R18.0 R19.0 R20.0 R21.0 R22.0 R23.0 R28.0 R29.0 U1.A1 U1.A3 U1.A4 U1.A5 U1.A6 U1.A8 U1.A9 U1.A10 U1.A14 U1.A15 U1.A18 U1.B1 U1.B2 U1.B3 U1.B4 U1.B6 U1.B7 U1.B8 U1.B9 U1.B13 U1.B14 U1.B16 U1.B17 U1.B18 U1.C1 U1.C2 U1.C4 U1.C5 U1.C6 U1.C7 U1.C9 U1.C10 U1.C11 U1.C14 U1.C15 U1.C16 U1.C17 U1.D2 U1.D3 U1.D4 U1.D5 U1.D7 U1.D8 U1.D9 U1.D10 U1.D12 U1.D13 U1.D14 U1.D17 U1.D18 U1.E1 U1.E2 U1.E3 U1.E5 U1.E6 U1.E7 U1.E15 U1.E16 U1.E17 U1.E18 U1.F1 U1.F3 U1.F4 U1.F5 U1.F6 U1.F13 U1.F14 U1.F15 U1.F16 U1.F18 U1.G1 U1.G2 U1.G3 U1.G4 U1.G6 U1.G13 U1.G14 U1.G16 U1.G17 U1.H1 U1.H2 U1.H4 U1.H5 U1.H6 U1.H14 U1.H15 U1.H16 U1.H17 U1.J2 U1.J3 U1.J4 U1.J5 U1.J9 U1.J10 U1.J13 U1.J14 U1.J15 U1.J17 U1.J18 U1.K1 U1.K2 U1.K3 U1.K5 U1.K6 U1.K9 U1.K10 U1.K13 U1.K15 U1.K16 U1.K17 U1.L3 U1.L4 U1.L5 U1.L6 U1.L9 U1.L10 U1.L13 U1.L14 U1.L15 U1.M2 U1.M3 U1.M4 U1.M6 U1.M13 U1.M14 U1.M16 U1.M17 U1.M18 U1.N2 U1.N4 U1.N5 U1.N6 U1.N14 U1.N15 U1.N16 U1.N17 U1.P2 U1.P3 U1.P4 U1.P5 U1.P14 U1.P15 U1.P17 U1.R2 U1.R3 U1.R5 U1.R6 U1.R7 U1.R8 U1.R10 U1.R11 U1.R12 U1.R13 U1.R15 U1.R16 U1.R17 U1.T3 U1.T4 U1.T5 U1.T6 U1.T8 U1.T9 U1.T10 U1.T11 U1.T13 U1.T14 U1.T15 U1.T16 U1.U2 U1.U3 U1.U4 U1.U6 U1.U7 U1.U8 U1.U9 U1.U11 U1.U12 U1.U13 U1.U14 U1.U16 U1.U17

## Polygon pours and split planes (outlines as drawn)
IOVREF on Layer 2 "IOVREF_L03_P001" (solid, pour order 1): 3090,4150 5500,4150 5500,1886 5444,1830 5337,1937 2941,1937 2941,4001 3007,4067
SHUNTL on Layer 2 "SHUNTL_L03_P000" (solid, pour order 0): 4583,3455 4600,3438 4600,3170 4572,3142 4391,3142 4298,3049 4298,2674 4296.05,2674 4270.05,2648 4128,2648 4096,2680 4110.24,2694.24 4110.24,3319.24 4246,3455
GND on Top Layer "GND_L01_P005" (solid, pour order 5): 5216.54,2913.39 5377.39,2913.39 ccw(c5377.39,2921) 5385,2921 5385,4079 ccw(c5374,4079) 5374,4090 5057,4090 ccw(c5057,4080) 5047,4080 5047,3295.54 cw(c5045,3295.54) 5045,3293.54 5157.41,3293.54 cw(c5157.41,3283.23) 5167.72,3283.23 5167.72,3055.12 5188.88,3055.12 cw(c5188.88,3048) 5196,3048 5196,2928 ccw(c5208,2928) 5208,2916
GND on Top Layer "GND_L01_P007" (solid, pour order 7): 3070.87,4157.48 cw(c3086.61,4157.48) 3086.61,4173.23 3511.81,4173.23 cw(c3511.81,4154.95) 3530.08,4154.95 3530.08,3748.03 3070.87,3748.03 cw(c3070.87,3779.53) 3039.37,3779.53 3039.37,3844.52
VCC1.8 on Bottom Layer "VCC1.8_L04_P003" (solid, remove dead copper, pour order 3): 4062.74,2897.64 4635.74,2897.64 ccw(c4635.74,2997.64) 4706.45,2926.93 4724.41,2944.88 ccw(c4697,2972.29) 4735.76,2972.29 4735.76,3167.41 ccw(c4692.1,3167.41) 4722.97,3198.29 4631.01,3290.25 cw(c4701.72,3360.96) 4601.72,3360.96 4601.72,3660 cw(c4624.15,3637.57) 4624.15,3669.29 4636.89,3669.29 cw(c4637.05,3627.87) 4666.34,3657.16 cw(c4640.2,3631.02) 4677.17,3631.02 4677.17,3427.25 ccw(c4777.16,3427.25) 4706.45,3356.54 4803.15,3259.84 cw(c4765.13,3221.83) 4818.9,3221.82 4818.9,2416.92 cw(c4718.9,2416.92) 4789.61,2346.21 4787.4,2344 cw(c4755.31,2376.09) 4755.31,2330.71 3587.73,2330.71 cw(c3587.73,2410.23) 3531.5,2354 cw(c3579.02,2401.52) 3511.81,2401.52 3511.81,2808.97 cw(c3611.81,2808.97) 3541.1,2879.68 3543.31,2881.89
GND on Bottom Layer "GND_L04_P006" (solid, pour order 6): 4998,4168 cw(c5011,4168) 5011,4181 5460,4181 cw(c5460,4177) 5464,4177 5464,2605 cw(c5431,2605) 5431,2572 5094.01,2572 cw(c5094.01,2601.01) 5065,2601.01 5065,3554.44 ccw(c5009,3554.44) 5009,3610.44
GND on Layer 1 (split plane): 173 vertices, not listed, extent 3108.91,2025.05 5378.85,4098.77

## Silkscreen, mask and mechanical layers (free items; w line width, h text height)
Top Overlay:
  drawing of 65 lines, arcs and shapes, not listed
  text "®" at 4466.33,3527.94 h70
  text "ChipWhisperer" at 3905.51,3503.53 h98.43
  text "DNM" at 4345.51,3418.68 h75
  text "SHUNT" at 4332.73,3282.8 h75 r90
  text "DONE RT" at 4607.94,3026.1 h70.87
  text "Hero" at 3232.36,2806.35 h135
  text "NAE-CW312T-A35" at 3118.11,2633.37 h98.43
  text "DONE" at 4920.75,2481.2 h70.87 r90
  text "INITB" at 5026.6,2472.44 h70.87 r90
  text "Artix A35 / FPGA Target" at 3118.11,2465.08 h98.43
  text "F/J" at 4264.79,2429.78 h78.74
  text "I/O" at 4061.03,2428.32 h78.74
  text "CSG324 Package FPGA" at 4578.99,2406.02 h98.43 r90
  text "FPGA Jaytag" at 4803.15,2378.45 h80
  text "NewAE Technology Inc." at 3128.44,2252.21 h78.74
  text "Serious Tools." at 3128.44,2191.83 h78.74
  text "1" at 4724.41,2047.31 h98.43
  text "CW JTAG Select" at 3489.86,2034.79 h78.74
Bottom Overlay:
  drawing of 4 lines, arcs and shapes, not listed
  text "NewAE Technology Inc." at 4503.94,3496.3 h78.74
  text "FPGA mode setting:" at 3842.52,3401.37 h78.74
  text "ChipWhisperer" at 4774.8,3351.19 h196.85 r45
  text "M2" at 3523.15,3344.66 h90 r90
  text "1" at 3460.25,3308.63 h40
  text "0" at 3466,3249 h40
  text "Fault Injection!" at 4354.7,3211.2 h78.74 r330
  text "M1" at 3523.15,3185.69 h90 r90
  text "Highly Professional Tools!" at 5299.33,3147.71 h78.74 r330
  text "1" at 3458.68,3144.72 h40
  text "0" at 3464,3090 h40
  text "Power Analysis!" at 5123.5,3061.85 h78.74 r30
  text "M0" at 3523.15,3014.35 h90 r90
  text "1" at 3458.68,2973.45 h40
  text "0" at 3464,2921 h40
  text "Default is 1-1-1 due to" at 3857.64,2830.24 h78.74
  text "pull-ups on FPGA." at 3858.27,2771.94 h78.74
  text "ChipWhisperer is a trademark of NewAE Technology Inc. It's even a registered trademarks in a wack of countries." at 3228.35,2755.9 h51.18 r112
  text "®" at 4055.32,2669.09 h157.48 r45
  text "Hard to believe it but this board is" at 5291.34,2663.58 h78.74
  text "Open Source" at 4905.88,2567.51 h157.48
  text "Although it's designed in Altium oops." at 4803.87,2488.48 h78.74
  text "Do not dispose of incorrectly!!!1!1" at 4377.95,2410.47 h78.74
  text "p" at 5354.33,2373.01 h300
  text "C" at 4834.65,2161.33 h500
  text "W" at 3685.04,2141.73 h300
  text "Rev: 04_FINAL_FINAL2_THISONE_MARCH27" at 5307.09,2047.54 h78.74
Mechanical 1:
  lines w3.94: 3088.86,4054.54 3088.86,4096.2 cw(c3111.5,4096.2) 3111.5,4118.83 3446.14,4118.83 cw(c3446.14,4085.65) 3479.33,4085.65 3479.33,3696.1 3479.33,3628.08 ; 3577.76,3628.4 3577.76,3696.1 3577.76,3902.65 3597.44,3922.34 4392.72,3922.34 4412.4,3902.65 4412.4,3629.03 ; 4487.2,3629.03 4487.2,3902.65 4506.89,3922.34 4908.46,3922.34 4928.15,3902.65 4928.15,3697.44 4928.15,3625.02 ; 5026.58,3620.53 5026.58,4096.91 cw(c5048.5,4096.91) 5048.5,4118.83 5383.15,4118.83 cw(c5383.15,4103.09) 5398.9,4103.09
  lines w3.97: 3088.86,4054.54 3088.86,2055 ccw(c3138.86,2055) 3138.86,2005 5348.9,2005 ccw(c5348.9,2055) 5398.9,2055 5398.9,4103.09 ; 3479.33,3628.08 ccw(c3508.41,3628.08) 3508.41,3599 3548.35,3599 ccw(c3548.35,3628.4) 3577.76,3628.4 ; 4412.4,3629.03 ccw(c4446.43,3629.03) 4446.43,3595 4453.17,3595 ccw(c4453.17,3629.03) 4487.2,3629.03 ; 4928.15,3625.02 ccw(c4963.17,3625.02) 4963.17,3590 4996.05,3590 ccw(c4996.05,3620.53) 5026.58,3620.53